# Altium PCB PCB.PcbDoc
Units mil, origin at the board's own origin, x right, y up, seen from the top; angles counter-clockwise.
Board outline 4409.45 x 1614.17 mil, 2 copper layers (Top Layer, Bottom Layer); 45 components, 37 nets, 139 pads, 36 vias.
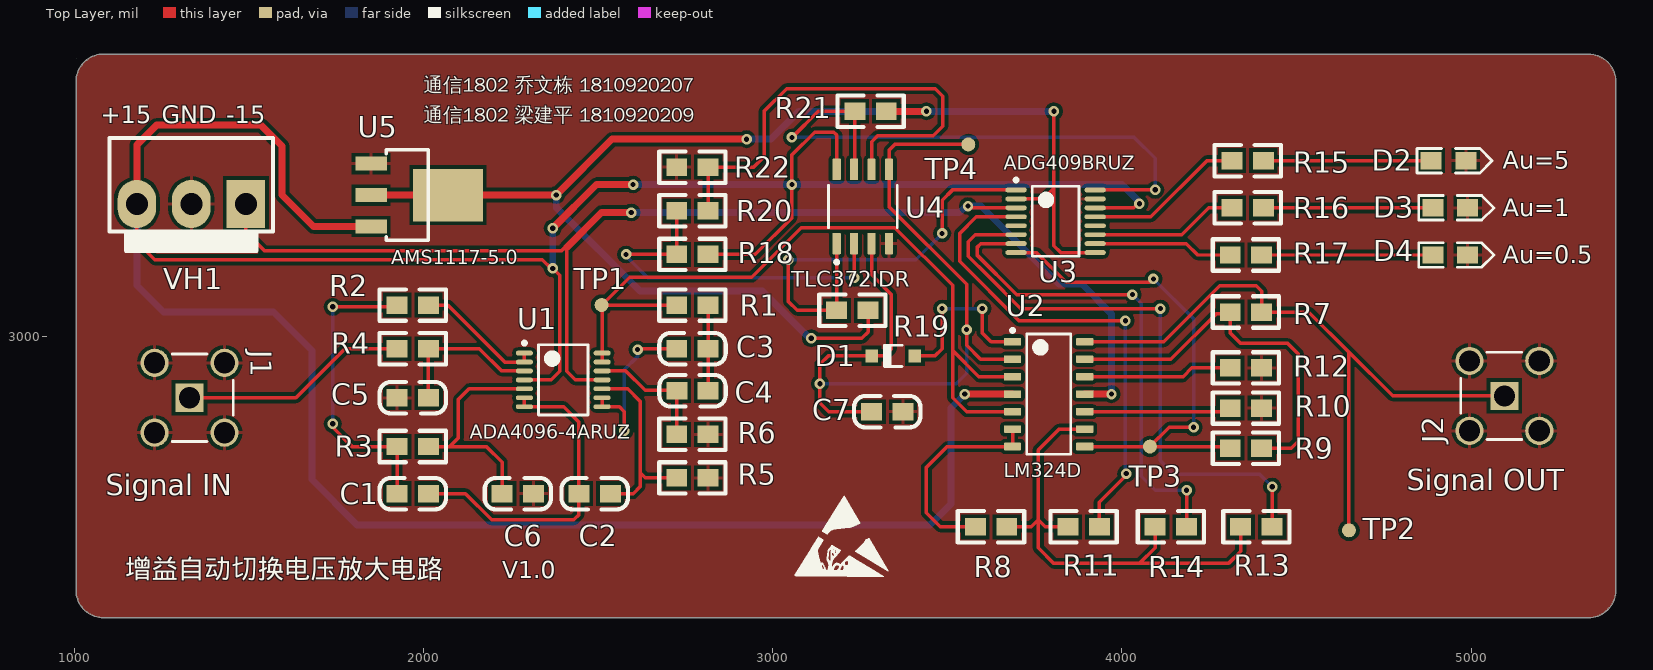
[diagram p0: Top Layer view]
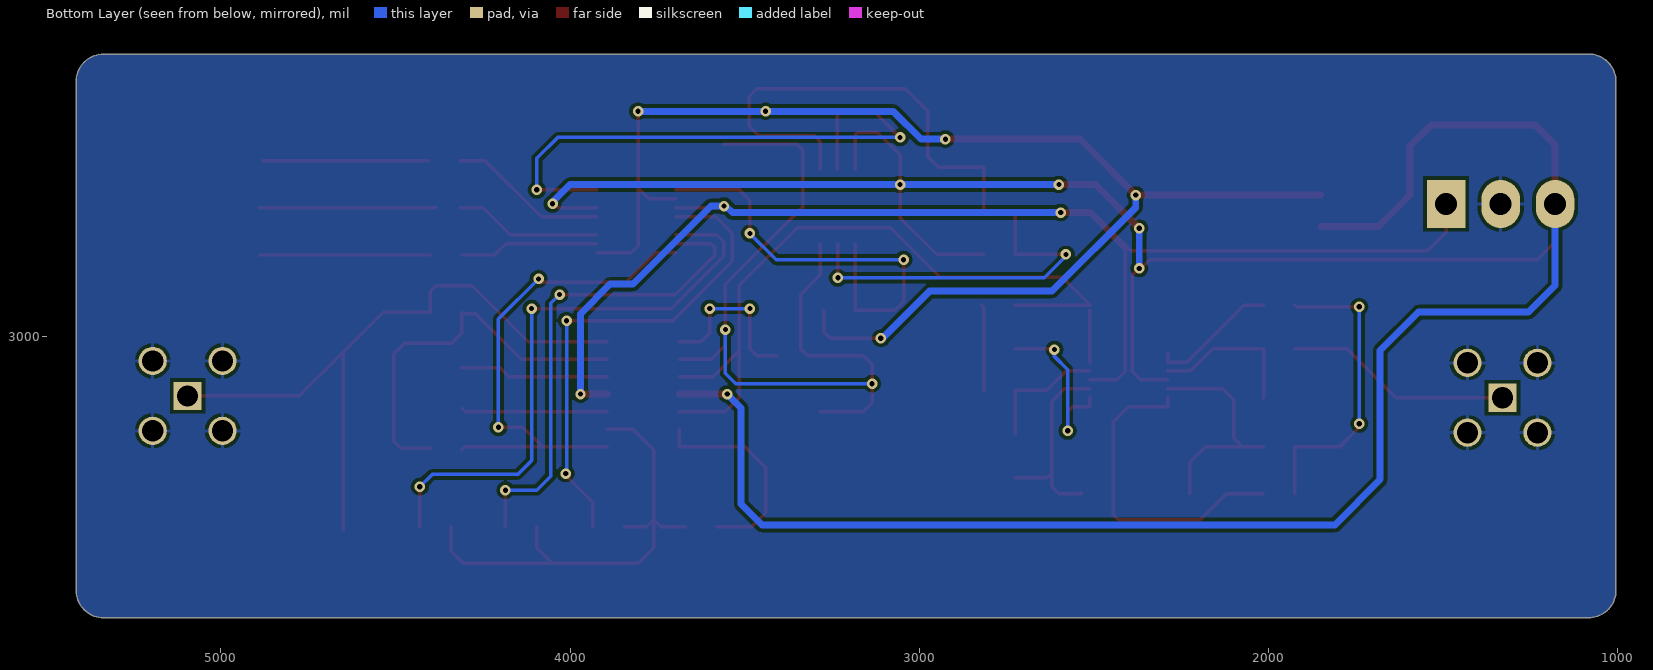
[diagram p1: Bottom Layer view, seen from below]
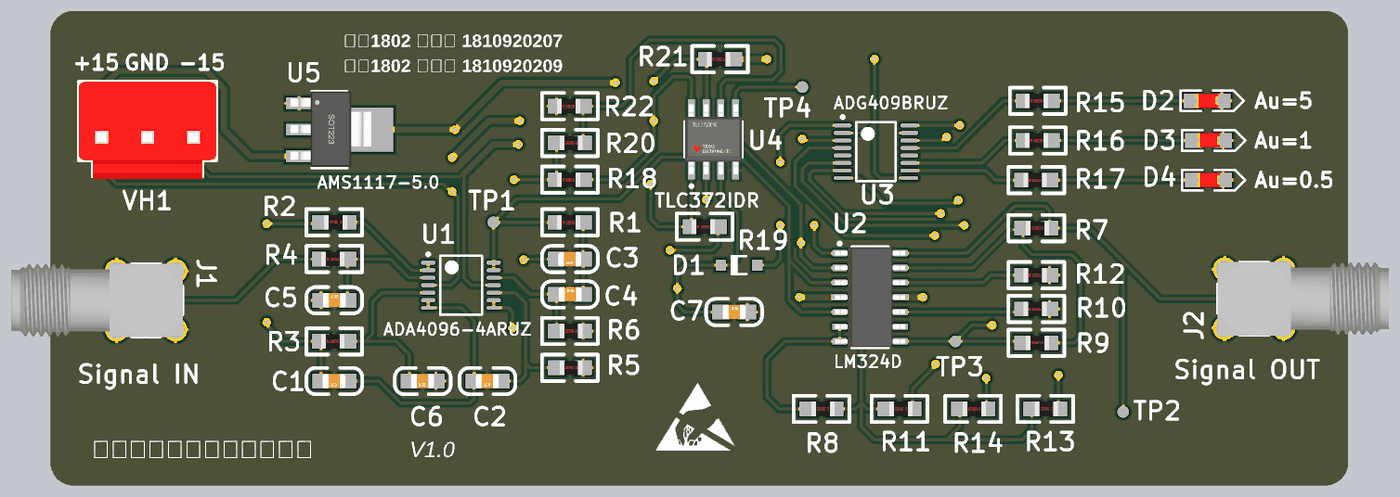
[diagram p2: 3D render of the assembled board from above, using the file's embedded part models]

## Layer stack, top to bottom
Top Solder: solder mask 0.4, Solder Resist, Dk 3.5
Top Layer: signal copper 1.4
Dielectric 1: dielectric 12.6, FR-4, Dk 4.8
Bottom Layer: signal copper 1.4
Bottom Solder: solder mask 0.4, Solder Resist, Dk 3.5

## Board outline
1005,2273.31 1005,3730 cw(c1083.74,3730) 1083.74,3808.74 5335.71,3808.74 cw(c5335.71,3730) 5414.45,3730 5414.45,2273.31 cw(c5335.71,2273.31) 5335.71,2194.57 1083.74,2194.57 cw(c1083.74,2273.31)
cut-out: 1005,3795

## Design rules (kind name [scope] priority, off if disabled: settings)
Clearance [All] p1: gap=10 ignorepadtopadclearanceinfootprint=FALSE except(0: Arc-Hole Track-Hole SMDPad-Hole THPad-Hole Via-Hole Fill-Hole Poly-Hole Region-Hole Text-Hole)
PolygonConnect [All] p1: connectstyle=Relief reliefconductorwidth=10 reliefentries=4 polygonreliefangle="90 Angle" airgapwidth=10
RoutingVias [All] p1: holewidth=28 width=50 viastyle="Through Hole" minholewidth=28 minwidth=50 maxholewidth=28 maxwidth=50
SolderMaskExpansion [All] p1: expansion=4 istentingtop=FALSE
Width [All] p1: maxlimit=20 minlimit=10 preferedwidth=10
30 further rules are at their usual default settings.

## Components (designator, comment, footprint, x,y, rotation, side; value= is the part's Value field where it differs from the comment)
C1 "1.0nF" 0805C 2013.59,2549.6 r180 top
C2 "100nF" 0805C 2534.29,2549.6 r180 top
C3 "51nF" 0805C 2814.29,2964.6 r180 top
C4 "51nF" 0805C 2725.85,2845 r0 top
C5 "1.0nF" 0805C 1925,2825 r0 top
C6 "100pF" 0805C 2314.29,2549.6 r180 top
C7 "2nF" 0805C 3283.7,2785 r0 top
D1 "1N4148W-7-F" DIOD-SOD123-2_V 3345,2944.6 r180 top
D2 "LED" LED-0805R 4885,3503.39 r0 top
D3 "LED" LED-0805R 4890,3368.39 r0 top
D4 "LED" LED-0805R 4890,3233.39 r0 top
J1 "731000114" MOLX-731000114_V 1330,2824.6 r0 top
J2 "731000114" MOLX-731000114_V 5095,2830 r180 top
R1 "105K" 0805R 2725,3090 r0 top
R2 "9.53K" 0805R 2014.15,3090 r180 top
R3 "76.8K" 0805R 1924.15,2685 r0 top
R4 "8.66k" 0805R 1924.15,2965 r0 top
R5 "107K" 0805R 2815,2595 r180 top
R6 "412K" 0805R 2815,2720 r180 top
R7 "100K" 0805R 4400,3070 r180 top
R8 "100K" 0805R 3670,2455 r180 top
R9 "100K" 0805R 4400,2680 r180 top
R10 "88K" 0805R 4310,2795 r0 top
R11 "500K" 0805R 3935,2455 r180 top
R12 "50K" 0805R 4310,2910 r0 top
R13 "100K" 0805R 4430,2455 r180 top
R14 "50K" 0805R 4185,2455 r180 top
R15 "510R" 0805R 4315,3503.39 r0 top
R16 "510R" 0805R 4315,3368.39 r0 top
R17 "510R" 0805R 4310,3233.39 r0 top
R18 "10K" 0805R 2725,3235 r0 top
R19 "5.1K" 0805R 3182.99,3075 r0 top
R20 "4K" 0805R 2815,3360 r180 top
R21 "5.1K" 0805R 3235,3645 r0 top
R22 "1K" 0805R 2725,3485 r0 top
TP1 "Test_Point" "TestPoint FootPrint" 2510,3090 r90 top
TP2 "Test_Point" "TestPoint FootPrint" 4650,2445 r90 top
TP3 "Test_Point" "TestPoint FootPrint" 4080,2685 r90 top
TP4 "Test_Point" "TestPoint FootPrint" 3560,3550 r90 top
U1 "ADA4096-4ARUZ" ADI-RU-14_L 2400,2875.78 r0 top
U2 "LM324D" D0014A_L 3790,2835 r0 top
U3 "ADG409BRUZ" ADI-RU-16_N 3810,3330 r0 top
U4 "TLC372IDR" FP-D0008A-MFG 3257.99,3372.32 r90 top
U5 "AMS1117-5.0" SOT223 1850,3405 r270 top
VH1 "VH3" VH3.96-3A 1490.91,3379.6 r180 top

## Footprints (in the part's own frame and the unit in brackets; to place one, negate y for a bottom-side part, rotate by r counter-clockwise, add the part's x,y. Pads: shape width x height; smd on the part's side, far side on the other; paste and mask are expansions set on the pad)
0805C [mil]
  rect 60x50 smd: 1(-0.71,-0.4) 2(89.29,-0.4)
  silkscreen extent -51,-45 139,45, body extent 6,-25 84,25, height 31
0805R [mil]
  rect 60x50 smd: 1(0,0) 2(90,0)
  silkscreen extent -50,-45 140,45, body extent 1,-25 80,25, height 15
ADI-RU-14_L [mm] "SOP, 14-Leads, Body 5x4.4mm, Pitch 0.65mm, IPC High Density"
  oval 1.25x0.35 smd: 1(-2.825,1.95) 2(-2.825,1.3) 3(-2.825,0.65) 4(-2.825,0) 5(-2.825,-0.65) 6(-2.825,-1.3) 7(-2.825,-1.95) 8(2.825,-1.95) 9(2.825,-1.3) 10(2.825,-0.65) 11(2.825,0) 12(2.825,0.65) 13(2.825,1.3) 14(2.825,1.95)
  silkscreen extent -2.95,-2.55 1.8,2.8, body extent -2.25,-2.55 2.25,2.55, height 1.2
ADI-RU-16_N [mm] "SOP, 16-Leads, Body 5x4.4mm, Pitch 0.65mm, IPC Medium Density"
  oval 1.55x0.35 smd: 1(-2.875,2.275) 2(-2.875,1.625) 3(-2.875,0.975) 4(-2.875,0.325) 5(-2.875,-0.325) 6(-2.875,-0.975) 7(-2.875,-1.625) 8(-2.875,-2.275) 9(2.875,-2.275) 10(2.875,-1.625) 11(2.875,-0.975) 12(2.875,-0.325) 13(2.875,0.325) 14(2.875,0.975) 15(2.875,1.625) 16(2.875,2.275)
  silkscreen extent -3,-2.55 1.7,3.12, body extent -2.25,-2.55 2.25,2.55, height 1.2
D0014A_L [mm] "SOIC, 14-Leads, Body 8.75x4mm, Pitch 1.27mm, IPC High Density"
  rrect18% 1.25x0.55 smd: 1(-2.625,3.81) 2(-2.625,2.54) 3(-2.625,1.27) 4(-2.625,0) 5(-2.625,-1.27) 6(-2.625,-2.54) 7(-2.625,-3.81) 8(2.625,-3.81) 9(2.625,-2.54) 10(2.625,-1.27) 11(2.625,0) 12(2.625,1.27) 13(2.625,2.54) 14(2.625,3.81)
  silkscreen extent -2.75,-4.38 1.6,4.76, body extent -3.02,-4.32 3.02,4.32, height 1.59
DIOD-SOD123-2_V [mm] "SOD123, 2-Leads, Body 2.7x1.55mm, Height 1.45mm"
  rect 0.9x0.95 smd: 1(-1.575,0) 2(1.575,0)
  silkscreen extent -0.64,-0.83 0.64,0.77, body extent -1.35,-0.77 1.35,0.77, height 1.45
FP-D0008A-MFG [mm]
  rrect17% 1.55x0.6 smd paste+0 mask+0: 1(-2.7,1.905) 2(-2.7,0.635) 3(-2.7,-0.635) 4(-2.7,-1.905) 5(2.7,-1.905) 6(2.7,-0.635) 7(2.7,0.635) 8(2.7,1.905)
  silkscreen extent -4.17,-2.5 1.55,2.5, body extent -3.57,-2.75 3.57,2.75, height 0.25
LED-0805R [mil]
  rect 60x50 smd: A(0,0) K(100,0)
  silkscreen extent -40,-35 175,35, body extent 11,-24 89,25, height 32
MOLX-731000114_V [mm] "Connector, 5-Leads, Body 14.8x6.35mm, Pitch 2.54mm"
  rect 2.05x2.05 hole 1.54: 1(0,0)
  round 2.05 hole 1.54: 2(-2.54,2.54) 3(-2.54,-2.54) 4(2.54,-2.54) 5(2.54,2.54)
  silkscreen extent -1.26,-3.17 3.17,3.17, body extent -11.62,-3.17 3.18,3.18, height 9.57
SOT223 [mil]
  rect 40x90 smd: 1(-90,0) 2(0,0) 3(90,0)
  rect 150x200 smd: 2(0,220)
  silkscreen extent -130,43 130,163, body extent -130,-30 126,246, height 65
"TestPoint FootPrint" [mil]
  round 40 smd: 0(0,0)
VH3.96-3A [mm]
  rect 2.8x3.5 hole 1.6: 1(0,0)
  oval 2.8x3.5 hole 1.6: 2(3.96,0) 3(7.92,0)
  silkscreen extent -1.98,-4.8 9.9,3.4, body extent -1.98,-4.8 9.9,3.6, height 14.6

## Part data
C1 C2 C3 C4 C5 C6 C7: library part CAP, "无极性电容"
D1: library part CMP-2000-04932-2, "Fast Switching Diode, 100 V, 0.15 A, -65 to 150 degC, 2-Pin?SOD123, RoHS, Tape and Reel", If - Forward Current=0.15A, Ir - Reverse Current=1uA, Manufacturer=DiodesIncorporated, Max Surge Current=2A, Maximum Operating Temperature=+150C, Minimum Operating Temperature=-65C, Operating Temperature Range=-65Cto+150C, Package / Case=SOD-123, Package Reference=SOD123-2, Peak Reverse Voltage=100V, Vf - Forward Voltage=1.25V, Brand=DiodesIncorporated, Configuration=Single, Datasheet URL=http://www.farnell.com/datasheets/1915529.pdf, Datasheet Version="Rev. 24-2, 10/2013", Factory Pack Quantity=3000, Height=1.25mm, Length=2.85mm, Manufacturer URL=http://www.diodes.com/, Mounting Style=SMD/SMT, Package URL=http://www.diodes.com/datasheets/ds18004.pdf, Packaging=Reel, Product=SwitchingDiodes, Product Category=Diodes-GeneralPurpose,Power,Switching, Recovery Time=4ns, RoHS=True, Series=1N4148, Type=SwitchingDiode, Unit Weight=0.000353oz, Width=1.7mm
J1 J2: library part CMP-2000-05487-1, "SMA Right-Angle PCB Jack Receptacle, Brass Body, Gold Plated, 50 Ohm, 5-Pin THD, RoHS, Tray", Manufacturer=Molex, Package Description="5-Pin Through Hole Device, Body 14.8 x 6.35 mm, Pitch 2.54 mm", Datasheet URL=http://www.molex.com/webdocs/datasheets/pdf/en-us/0731000114_RF_COAX_CONNECTORS.pdf, Datasheet Version=09/2016, Manufacturer URL=http://www.molex.com/, Mounting Technology=ThroughHole, Package Reference=731000114, Package URL=http://www.molex.com/pdm_docs/sd/731000114_sd.pdf
R1 R2 R3 R4 R5 R6 R7 R8 R9 R10 R11 R12 R13 R14 R15 R16 R17 R18 R19 R20 R21 R22: library part RES
U1: "Quad Channel RRIO Operational Amplifier, 800 KHz BW, 400 mV/us SR, Industrial, 14-pin SOP (RU-14), Tube", Amplifiers Per Package=4, Generic Part Number=ADA4096-4, Input Bias Current=3nA, Input Offset Voltage=35uV, Manufacturer="Analog Devices", Code_JEDEC=MO-153AB-1, ComponentLink1Description="Manufacturer URL", ComponentLink1URL=http://www.analog.com/en/index.html, ComponentLink2Description=Datasheet, ComponentLink2URL=http://www.analog.com/static/imported-files/data_sheets/ADA4096-2_4096-4.pdf, ComponentLink3Description="Package Specification", ComponentLink3URL=http://www.analog.com/static/imported-files/packages/36057385283879153717235186773RU14.pdf, DatasheetVersion="Rev. C", Iq/Amp=60uA, Mounting Technology="Surface Mount", PackageDescription="14-Pin Thin Shrink Small Outline Package, Body 5 x 4.4 mm, Pitch 0.65 mm", PackageReference=RU-14, Packing=Tube, PartNumber=ADA4096-4ARUZ, Slew Rate=400mV/us, Small Signal Bandwidth=800KHz, V Span Max=30V, V Span Min=3V
U2: library part CMP-2000-06547-1, "Quadruple Operational Amplifier, 0.5 V/us, 1.2 MHz, 3 to 32 V, 0 to 70 degC, 14-Pin SOIC (D), Green (RoHS & no Sb/Br), Tube", Dual Supply Voltage (Max)=±16V, Dual Supply Voltage (Min)=±1.5V, Dual Supply Voltage (Typ)=±3/±5/±9/±12/±15V, Input Bias Current=250nA, Input Offset Voltage=7mV, Manufacturer="Texas Instruments", Operating Temp Range=0Cto70C, Operating Temperature Classification=Commercial, Package Description="14-Pin Small Outline Integrated Circuit, Body 8.65 x 3.9 mm, Pitch 1.27 mm", Package Reference=D0014A, Package Type=SOIC, Power Supply Requirement=Single/Dual, Single Supply Voltage (Max)=32V, Single Supply Voltage (Min)=3V, Single Supply Voltage (Typ)=5/9/12/15/18/24/28V, Voltage Gain in dB=100dB, Common Mode Rejection Ratio=65dB, Datasheet URL=http://www.ti.com/lit/ds/symlink/lm324.pdf, Datasheet Version="Rev. W, 03/2015", Manufacturer URL=http://www.ti.com/, Mounting=SurfaceMount, Mounting Technology=SurfaceMount, Number of  Elements=4, Package URL=http://www.ti.com/lit/ml/mpds177g/mpds177g.pdf, Packaging=Rail/Tube, Pin Count=14, Rail/Rail I/O Type=No, Shut Down Feature=No, Slew Rate=0.5V/us, Technology=Bipolar, Type=GeneralPurposeAmplifier, Unity Gain Bandwidth Product=1.2MHz
U3: library part CMP-0793-00115-1, "LC2MOS 4-Channel High Performance Analog Multiplexer, 40 Ohm / 90 Ohm Ron, 16-pin SOP (RU-16), Tube", Manufacturer="Analog Devices", Code_JEDEC=MO-153AB, ComponentLink1Description="Manufacturer URL", ComponentLink1URL=http://www.analog.com/en/index.html, ComponentLink2Description=Datasheet, ComponentLink2URL=http://www.analog.com/static/imported-files/data_sheets/ADG408_409.pdf, ComponentLink3Description="Package Specification", ComponentLink3URL=http:/www.analog.com/static/imported-files/packages/36244347913743854010197452789RU16.pdf, DatasheetVersion="Rev. C", Max Analog Signal Range="Vss to Vdd", Mounting Technology="Surface Mount", PackageDescription="16-Pin Thin Shrink Small Outline Package, Body 5 x 4.4 mm, Pitch 0.65 mm", PackageReference=RU-16, PackageVersion=Nov-02, Packing=Tube, PartNumber=ADG409BRUZ, Ron (ohms)=40, t transition (s)=120n
U4: library part CMP-04896-000010-1, "IC DIFF COMP DUAL 8-SOIC", Ambient Temperature Range High=+85°C, Ambient Temperature Range Low=-40°C, Input Bias Current=0.000005uA, Input Offset Voltage=1mV, Manufacturer="Texas Instruments", Max Dual Supply Voltage=18V, Max Supply Voltage=16V, Min Dual Supply Voltage=2V, Min Supply Voltage=3V, Nominal Supply Current=150uA, Package=D0008A, Temperature="-40°C to +85°C", Automotive=No, Category=IC, ComponentLink2Description=Datasheet, ComponentLink2URL=http://www.ti.com/lit/ds/symlink/tlc372.pdf, Device Class L1="Integrated Circuits (ICs)", Device Class L2="Linear ICs", Device Class L3=Comparators, Digikey Description="IC DIFF COMP DUAL 8-SOIC", Height=1.75mm, Ipc Land Pattern Name=SOIC127P600X175-8, Lead Free=Yes, Manufacturer Part Number=TLC372IDR, Mouser Description="Analog Comparators Dual LinCMOS Differential", Number Of Channels=2, Octopart=https://octopart.com/tlc372idr-texas+instruments-841294, Response Time=200-650ns, RoHS=TRUE, Standoff Height=0.11mm, Temperature Range High=+85°C, Temperature Range Low=-40°C
U5: library part AMS1117, "三端稳压芯片"

## Via types
v1: diameter 30, hole 15, Top Layer to Bottom Layer, 36 vias

## Nets (pads, with @x,y where several pads share a name; then routed paths per layer and width w, separated by ;. In a path a pad name is that pad's centre, name@x,y a point inside that pad or via, vN(x,y) a via of type N, cw(c..) or ccw(c..) an arc to the next point about the centre after c; other vN are vias at no path point)
+5: R19.2 R21.2 U3.2 U3.9 U5.2 | length 3954.6
  Top Layer w10: v1(3110,2995) 3255,2995 3272.99,3012.99 R19.2 ; U3.2 3773.98,3393.98 3805,3425 ; v1(3805,3645) 3805,3425 ; U3.9 3824.57,3240.43 3805,3260 3805,3425
  Top Layer w20: U5.2@1850,3405 2070,3405 v1(2380,3405) 2540,3565 cw(c2545,3560) 2540.07,3565.07 2549.93,3565.07 cw(c2545,3560) 2550,3565 2555.38,3565 v1(2925,3565) ; R21.2 v1(3440,3645)
  Bottom Layer w20: v1(2380,3405) 2380,3370 2620,3130 2970,3130 3105,2995 v1(3110,2995) ; v1(2925,3565) 2995,3565 3075,3645 v1(3440,3645) v1(3805,3645)
+15: R18.2 U1.4 U2.4 U3.14 U4.8 U5.3 VH1.3 | length 9094
  Top Layer w10: VH1.3 1179.09,3270.91 1230,3220 2340,3220 2365,3195 v1(2370,3195) 2390,3175 2390,2900 2365.78,2875.78 U1.4 ; R18.2 2950,3235 3055,3340 v1(3055,3435) 3055,3520 3120,3585 3175,3585 3182.99,3577.01 U4.8 ; U3.14 4034.14,3368.39 4045.76,3380 v1(4050,3380)
  Top Layer w20: VH1.3 1179.09,3549.09 1235,3605 1535,3605 1595,3545 1595,3405 1685,3315 U5.3 ; v1(2370,3310) 2495,3435 v1(2600,3435) ; v1(3550,2835) U2.4
  Bottom Layer w20: VH1.3 1179.09,3145.91 1255,3070 1570,3070 1680,2960 1680,2590 1810,2460 3450,2460 3510,2520 3510,2795 v1(3550,2835) ; v1(2370,3195) v1(2370,3310) ; v1(2600,3435) v1(3055,3435) 4000,3435 4050,3385 v1(4050,3380)
-15: U1.11 U2.11 U3.3 VH1.1 | length 3670.6
  Top Layer w10: VH1.1 1490.91,3299.09 1545,3245 2394.59,3245 2404.59,3255 2410,3255 2410,2900 2434.22,2875.78 U1.11 ; v1(3559.06,3373.65) 3560.41,3375 3567.03,3368.39 U3.3
  Top Layer w20: 2410,3255 2510,3355 v1(2595,3355) ; U2.11 v1(3970,2835)
  Bottom Layer w20: v1(2595,3355) 3535,3355 v1@3552.85,3372.85 ; v1(3559.06,3373.65) 3596.35,3373.65 3820,3150 3885,3150 3970,3065 v1(3970,2835)
Fliter_Out: R1.1 TP1.0 U1.13 U1.14 U2.3 U2.5 | length 2240.5
  Top Layer w10: U1.13 U1.14 TP1.0@2511.22,3075 ; R1.1 TP1.0 2590,3170 2940,3170 3081.54,3311.54 3349.84,3311.54 3515,3146.38 3515,2960 ; U2.5 3555,2785 3515,2825 3515,2960 ; U2.3 3590,2885 3515,2960
GND: C5.1 C6.1 C7.2 D2.K D3.K D4.K J1.2 J1.3 J1.4 J1.5 J2.2 J2.3 J2.4 J2.5 R5.1 R6.1 R10.2 R12.2 R22.1 U3.15 U4.4 U5.1 VH1.2
NetC1_1: C1.1 C2.2 U1.6 U1.7 | length 933
  Top Layer w10: C1.1 2120,2550 2195,2475 2430,2475 2445,2490 C2.2 2445,2755 2400.99,2799.01 U1.7 U1.6
NetC1_2: C1.2 R2.2 R3.1 | length 873.2
  Top Layer w10: v1(1740,2750) 1743.83,2746.17 1743.83,2736.17 1795,2685 R3.1 1924.15,2550.14 C1.2 ; v1(1740,3085) 1919.15,3085 R2.2
  Bottom Layer w10: v1(1740,2750) v1(1740,3085)
NetC2_1: C2.1 R5.2 U1.10 | length 574.6
  Top Layer w10: U1.10 2584.81,2850.19 2619.91,2815.09 2619.91,2610.09 ; C2.1 C2.1@2539.14,2554.14 ; C2.1@2539.14,2550 2600,2550 2619.91,2569.91 2619.91,2610.09 ; R5.2 2635,2595 2619.91,2610.09
NetC3_1: C3.1 C4.2 R1.2 | length 247.2
  Top Layer w10: C4.2 2815.14,2964.86 C3.1 2815,3083.06 R1.2@2821.15,3089.21
NetC3_2: C3.2 U1.8 U1.9 | length 514
  Top Layer w10: U1.9 U1.8 2560.99,2799.01 2575,2785 v1(2575,2730) ; v1(2612.71,2962.71) 2615.41,2960 2620.41,2965 C3.2
  Bottom Layer w10: v1(2575,2730) 2575,2905 2612.71,2942.71 v1(2612.71,2962.71)
NetC4_1: C4.1 R6.2 U1.12 | length 362.5
  Top Layer w10: U1.12 2578.63,2901.37 2634.37,2845.63 2725,2845.63 R6.2
NetC5_2: C5.2 R4.2 U1.3 | length 441.4
  Top Layer w10: C5.2 2014.15,2824.74 R4.2 2160,2965 2223.63,2901.37 U1.3
NetC6_2: C6.2 R3.2 U1.5 | length 666.1
  Top Layer w10: R3.2 2075,2685 ; C6.2 2225,2640 2180,2685 2075,2685 ; U1.5 2130.19,2850.19 2100,2820 2100,2710 2075,2685
NetC7_1: C7.1 D1.2 TP4.0 U2.2 U4.3 U4.5 | length 2406.4
  Top Layer w10: C7.1 3160.4,2784.6 3135,2810 v1(3135,2865) 3135,2920 3159.6,2944.6 D1.2 3319.6,2944.6 3340,2965 3340,3120 3282.99,3177.01 U4.3 ; TP4.0 3350,3550 3332.99,3532.99 U4.5 3332.99,3372.01 3555,3150 v1(3555,3020) 3555,2975 3595,2935 U2.2
  Bottom Layer w10: v1(3135,2865) 3525,2865 3555,2895 v1(3555,3020)
NetD1_1: D1.1 U2.1 | length 483.5
  Top Layer w10: D1.1 3464.6,2944.6 3485,2965 v1(3485,3080) ; v1(3600,3080) 3600,3010 3625,2985 U2.1
  Bottom Layer w10: v1(3485,3080) v1(3600,3080)
NetD2_A: D2.A R15.2 | length 474.6
  Top Layer w10: R15.2 4878.51,3503.39 D2.A@4879.26,3504.13
NetD3_A: D3.A R16.2 | length 506.3
  Top Layer w10: R16.2@4384.44,3370.17 4386.22,3368.39 R16.2 D3.A
NetD4_A: D4.A R17.2 | length 490
  Top Layer w10: R17.2 D4.A
NetJ1_1: J1.1 R4.1 | length 652.3
  Top Layer w10: J1.1 1634.6,2824.6 1775,2965 R4.1
NetJ2_1: J2.1 R7.1 TP2.0 U2.14 | length 1943.6
  Top Layer w10: U2.14 4120,2985 4280,3145 4385,3145 4400,3130 R7.1 4535,3070 4650,2955 ; TP2.0 4650,2955 ; J2.1 4775,2830 4650,2955
NetR2_1: R2.1 U1.1 U1.2 | length 367.7
  Top Layer w10: R2.1 2070,3090 2233.04,2926.96 U1.2 U1.1
NetR7_2: R7.2 R9.1 U2.13 | length 1115.7
  Top Layer w10: U2.13 4140,2935 4270.86,3065.86 4305.86,3065.86 R7.2 4310,3010 4340,2980 4475,2980 4505,2950 4505,2700 4485,2680 R9.1
NetR8_1: R8.1 R11.2 R13.2 R14.2 U2.9 | length 1436.5
  Top Layer w10: R8.1 3740,2455 3760,2475 ; R11.2 3780,2455 3760,2475 ; U2.9 3820,2735 3760,2675 3760,2475 ; R14.2 4095,2395 4050,2350 ; R13.2 4340,2385 4305,2350 4050,2350 ; 3760,2475 3760,2395 3805,2350 4050,2350
NetR8_2: R8.2 U2.6 U2.7 | length 608.1
  Top Layer w10: R8.2 3480,2455 3440,2495 3440,2625 3500,2685 U2.7 U2.6
NetR9_2: R9.2 TP3.0 U2.8 U3.8 | length 1468.9
  Top Layer w10: U3.8 3754.57,3240.43 3840,3155 4080,3155 v1(4090,3165) ; U2.8 TP3.0 ; v1(4205,2740) 4135,2740 TP3.0 ; R9.2@4310,2675 4300,2685 TP3.0
  Bottom Layer w10: v1(4090,3165) 4205,3050 v1@4205,2745
NetR10_1: R10.1 U2.10 | length 420.8
  Top Layer w10: U2.10 4300,2785 R10.1
NetR11_1: R11.1 U3.4 | length 1430.2
  Top Layer w10: U3.4 3582.8,3342.8 3535,3295 3535,3215 3705,3045 v1(4010,3045) ; R11.1 3935,2525 4012.5,2602.5 v1(4012.5,2607.5)
  Bottom Layer w10: v1(4010,3045) 4010,2610 v1(4012.5,2607.5)
NetR12_1: R12.1 U2.12 | length 427
  Top Layer w10: U2.12 4175,2885 4200,2910 R12.1
NetR13_1: R13.1 U3.6 | length 1699.9
  Top Layer w10: U3.6 3580,3291.61 3560,3271.61 3560,3230 3615,3175 3710,3080 v1(4110,3080) ; R13.1 v1(4430,2570)
  Bottom Layer w10: v1(4110,3080) 4110,2645 4150,2605 4395,2605 v1(4430,2570)
NetR14_1: R14.1 U3.7 | length 1411.9
  Top Layer w10: U3.7 3596.02,3266.02 3585,3255 3585,3233.28 3698.28,3120 v1(4030,3120) ; R14.1 v1(4185,2560)
  Bottom Layer w10: v1(4030,3120) 4055,3095 4055,2600 4095,2560 v1(4185,2560)
NetR18_1: R18.1 R20.2 U4.2 | length 1051.7
  Top Layer w10: v1(2580,3235) R18.1 R20.2 ; v1(3232.99,3167.99) U4.2
  Bottom Layer w10: v1(2580,3235) 2580,3230 2642.01,3167.99 v1(3232.99,3167.99)
NetR19_1: R19.1 U3.1 U4.1 | length 1249.5
  Top Layer w10: v1(3045,3220) 3045,3100 3070,3075 R19.1 U4.1 ; v1(3485,3295) 3485,3390 3514.57,3419.57 U3.1
  Bottom Layer w10: v1(3045,3220) 3410,3220 v1(3485,3295)
NetR20_1: R20.1 R22.2 U4.6 | length 1363.3
  Top Layer w10: R20.1 R22.2 2945,3485 2975,3515 2975,3645 3040,3710 3465,3710 3487.28,3687.72 3487.28,3602.28 3460,3575 3300,3575 3282.99,3557.99 U4.6
NetR21_1: R21.1 U3.16 U4.7 | length 1705.1
  Top Layer w10: v1(3055,3570) 3130,3645 R21.1 3235,3480.63 U4.7 ; U3.16 4094.57,3419.57 v1(4095,3420)
  Bottom Layer w10: v1(3055,3570) 4035,3570 4095,3510 v1(4095,3420)
S1B: R15.1 U3.13 | length 458.3
  Top Layer w10: U3.13 4082.8,3342.8 4243.39,3503.39 R15.1
S3B: R16.1 U3.11 | length 423.6
  Top Layer w10: U3.11 4171.61,3291.61 4248.39,3368.39 R16.1
S4B: R17.1 U3.10 | length 400.3
  Top Layer w10: U3.10 4183.98,3266.02 4216.61,3233.39 R17.1
pads on no net: U3.5 U3.12

## Polygon pours and split planes (outlines as drawn)
GND on Top Layer "Top Layer-No Net" (solid, pour order 1): 1005,2273.31 1005,3730 cw(c1083.74,3730) 1083.74,3808.74 5335.71,3808.74 cw(c5335.71,3730) 5414.45,3730 5414.45,2273.31 cw(c5335.71,2273.31) 5335.71,2194.57 1083.74,2194.57 cw(c1083.74,2273.31)
GND on Bottom Layer "Top Layer-No Net1" (solid, pour order 2): 1005,2273.31 1005,3730 cw(c1083.74,3730) 1083.74,3808.74 5335.71,3808.74 cw(c5335.71,3730) 5414.45,3730 5414.45,2273.31 cw(c5335.71,2273.31) 5335.71,2194.57 1083.74,2194.57 cw(c1083.74,2273.31)

## Silkscreen, mask and mechanical layers (free items; w line width, h text height)
Top Overlay:
  drawing of 1377 lines, arcs and shapes, not listed
  text "通信1802 乔文栋 1810920207" at 2000,3686.22 h70
  text "+15" at 1075,3610 h50
  text "GND" at 1250,3610 h50
  text "-15" at 1435,3610 h50
  text "通信1802 梁建平 1810920209" at 2000,3601.22 h70
  text "Au=5" at 5090,3480 h50
  text "ADG409BRUZ" at 3662,3477 h40
  text "Au=1" at 5090,3345 h50
  text "Au=0.5" at 5090,3210 h50
  text "AMS1117-5.0" at 1907,3207 h40
  text "TLC372IDR" at 3053,3143 h45
  text "ADA4096-4ARUZ" at 2132,2707 h40
  text "LM324D" at 3662,2597 h40
  text "Signal OUT" at 4815,2559.99 h60
  text "Signal IN" at 1090,2544.99 h60
  text "V1.0" at 2225,2290.94 h85
  text "增益自动切换电压放大电路" at 1145.09,2288.44 h95
Mechanical 1:
  the board outline again, w39.37